# Altium PCB sample_board.PcbDoc
Units mil, origin at the board's own origin, x right, y up, seen from the top; angles counter-clockwise.
Board outline 1141.73 x 1968.5 mil, 2 copper layers (Top Layer, Bottom Layer); 3 components, 7 nets, 32 pads, 6 vias.
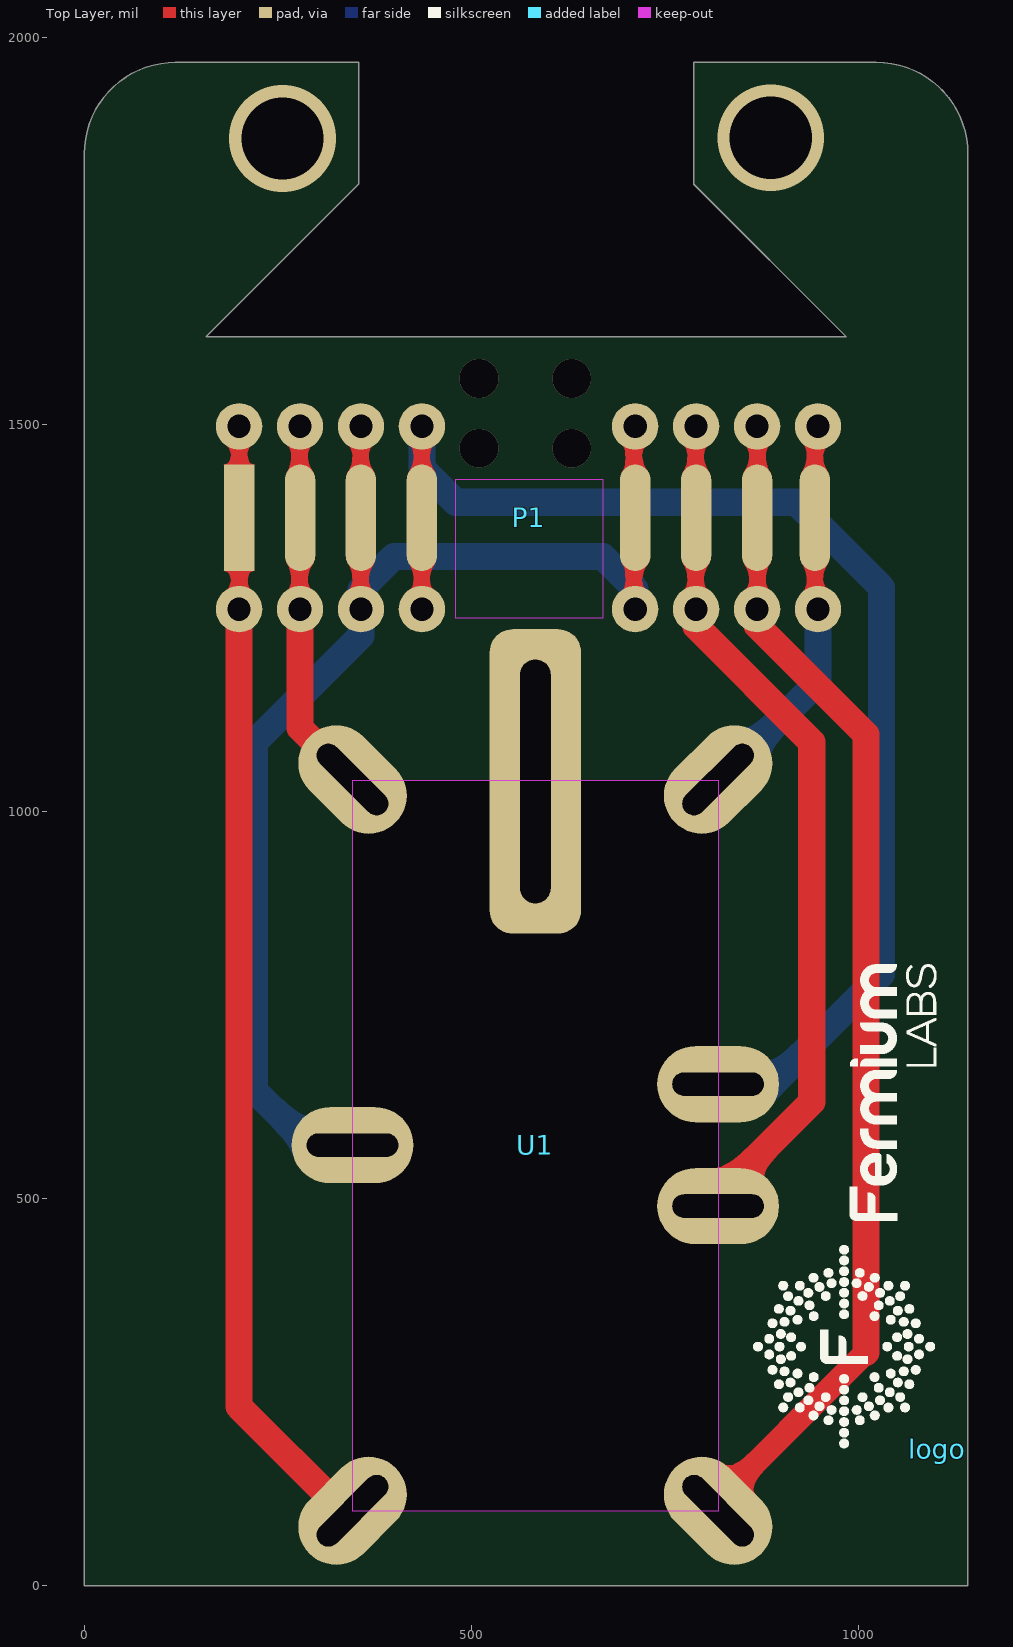
[diagram p0: Top Layer view]
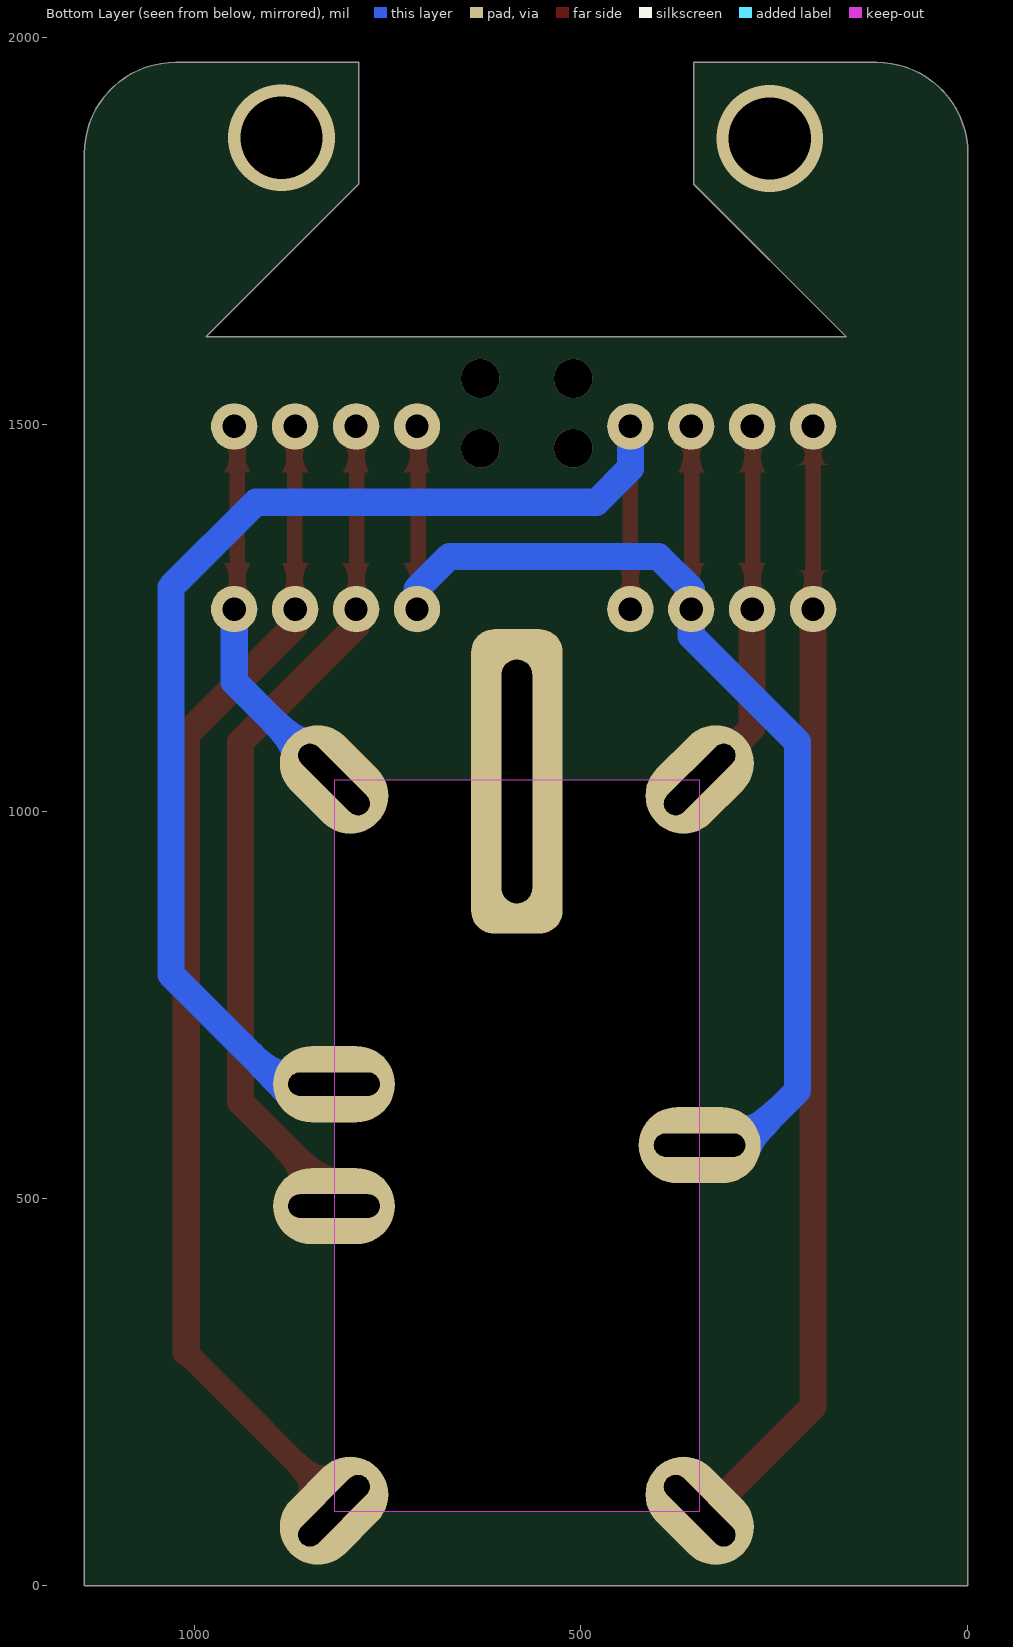
[diagram p1: Bottom Layer view, seen from below]

## Layer stack, top to bottom
Top Solder: solder mask 0.4, Solder Resist, Dk 3.5
Top Layer: signal copper 1.4
Dielectric 1: dielectric 12.6, FR-4, Dk 4.8
Bottom Layer: signal copper 1.4
Bottom Solder: solder mask 0.4, Solder Resist, Dk 3.5

## Board outline
0,0 0,1850.39 cw(c118.11,1850.39) 118.11,1968.5 354.33,1968.5 354.33,1811.02 157.48,1614.17 984.25,1614.17 787.4,1811.02 787.4,1968.5 1023.62,1968.5 cw(c1023.62,1850.39) 1141.73,1850.39 1141.73,0
cut-out: 819,96.12 346.56,96.12 346.56,1041 819,1041

## Design rules (kind name [scope] priority, off if disabled: settings)
Clearance [All] p1 off: gap=10 ignorepadtopadclearanceinfootprint=FALSE
ComponentClearance [All] p1 off: gap=10 collisioncheckmode=3 verticalgap=10 showdistances=FALSE
DiffPairsRouting [All] p1: maxlimit=10 minlimit=10 mostfreqgap=10 toplayer_minwidth=15 toplayer_maxwidth=15 toplayer_prefwidth=15 bottomlayer_minwidth=15 bottomlayer_maxwidth=15 bottomlayer_prefwidth=15 substack1={CB7ECF17-E3E6-404F-AFC1-A2D4EA55E508} toplayer_{cb7ecf17-e3e6-404f-afc1-a2d4ea55e508}_minwidth=15 toplayer_{cb7ecf17-e3e6-404f-afc1-a2d4ea55e508}_maxwidth=15 toplayer_{cb7ecf17-e3e6-404f-afc1-a2d4ea55e508}_prefwidth=15 bottomlayer_{cb7ecf17-e3e6-404f-afc1-a2d4ea55e508}_minwidth=15 bottomlayer_{cb7ecf17-e3e6-404f-afc1-a2d4ea55e508}_maxwidth=15 bottomlayer_{cb7ecf17-e3e6-404f-afc1-a2d4ea55e508}_prefwidth=15 substack2={E5E8CB27-7398-4565-A729-E75956F7CBE6} toplayer_{e5e8cb27-7398-4565-a729-e75956f7cbe6}_minwidth=15 toplayer_{e5e8cb27-7398-4565-a729-e75956f7cbe6}_maxwidth=15 toplayer_{e5e8cb27-7398-4565-a729-e75956f7cbe6}_prefwidth=15 bottomlayer_{e5e8cb27-7398-4565-a729-e75956f7cbe6}_minwidth=15 bottomlayer_{e5e8cb27-7398-4565-a729-e75956f7cbe6}_maxwidth=15 bottomlayer_{e5e8cb27-7398-4565-a729-e75956f7cbe6}_prefwidth=15 substack3={485D2BC1-8D0F-489D-82EF-096F16EA431D} toplayer_{485d2bc1-8d0f-489d-82ef-096f16ea431d}_minwidth=15 toplayer_{485d2bc1-8d0f-489d-82ef-096f16ea431d}_maxwidth=15 toplayer_{485d2bc1-8d0f-489d-82ef-096f16ea431d}_prefwidth=15 bottomlayer_{485d2bc1-8d0f-489d-82ef-096f16ea431d}_minwidth=15 bottomlayer_{485d2bc1-8d0f-489d-82ef-096f16ea431d}_maxwidth=15 bottomlayer_{485d2bc1-8d0f-489d-82ef-096f16ea431d}_prefwidth=15 substack4={A28852D3-6787-470E-80FA-86EC0CA4A88A} toplayer_{a28852d3-6787-470e-80fa-86ec0ca4a88a}_minwidth=15 toplayer_{a28852d3-6787-470e-80fa-86ec0ca4a88a}_maxwidth=15 toplayer_{a28852d3-6787-470e-80fa-86ec0ca4a88a}_prefwidth=15 bottomlayer_{a28852d3-6787-470e-80fa-86ec0ca4a88a}_minwidth=15 bottomlayer_{a28852d3-6787-470e-80fa-86ec0ca4a88a}_maxwidth=15 bottomlayer_{a28852d3-6787-470e-80fa-86ec0ca4a88a}_prefwidth=15 maxuncoupledlength=500
FanoutControl Fanout_Small [All] p1 off: bgadir=Out bgaviamode=Centered fanoutstyle=Auto fanoutdirection=Alternating viagrid=1 // Protel DXP Scope 1 Expression Was: (CompPinCount < 5)   Fanout_Small (Default Rule)
FanoutControl Fanout_Default [All] p2: bgadir=Out bgaviamode=Centered fanoutstyle=Auto fanoutdirection=Alternating viagrid=1 // Fanout_Default (Default Rule)
FanoutControl Fanout_SOIC [All] p3 off: bgadir=Out bgaviamode=Centered fanoutstyle=Auto fanoutdirection=Alternating viagrid=1 // Protel DXP Scope 1 Expression Was: IsSOIC   Fanout_SOIC (Default Rule)
FanoutControl Fanout_BGA [All] p4 off: bgadir=Out bgaviamode=Centered fanoutstyle=Auto fanoutdirection=Alternating viagrid=1 // Protel DXP Scope 1 Expression Was: IsBGA   Fanout_BGA (Default Rule)
FanoutControl Fanout_LCC [All] p5 off: bgadir=Out bgaviamode=Centered fanoutstyle=Auto fanoutdirection=Alternating viagrid=1 // Protel DXP Scope 1 Expression Was: IsLCC   Fanout_LCC (Default Rule)
HoleSize [All] p1 off: absolutevalues=TRUE maxlimit=100 minlimit=1 maxpercent=80.000 minpercent=20.000
HoleToHoleClearance [All] p1 off: gap=10 allowstackedmicrovias=TRUE
PolygonConnect [All] p1: connectstyle=Relief reliefconductorwidth=10 reliefentries=4 polygonreliefangle="90 Angle" airgapwidth=10
RoutingVias [All] p1: holewidth=28 width=50 viastyle="Through Hole" minholewidth=28 minwidth=50 maxholewidth=28 maxwidth=50
ShortCircuit [All] p1 off: allowed=FALSE
SilkToSolderMaskClearance [All] p1 off: minsilkscreentomaskgap=10 clearancetoexposedcopper=TRUE // Protel DXP Scope 1 Expression Was: IsPad
SolderMaskExpansion [All] p1: expansion=4 istentingtop=FALSE
Width [All] p1: maxlimit=50 minlimit=10 preferedwidth=25 substack1={CB7ECF17-E3E6-404F-AFC1-A2D4EA55E508} substack2={E5E8CB27-7398-4565-A729-E75956F7CBE6} substack3={485D2BC1-8D0F-489D-82EF-096F16EA431D} substack4={A28852D3-6787-470E-80FA-86EC0CA4A88A}
19 further rules are at their usual default settings.

## Components (designator, comment, footprint, x,y, rotation, side; value= is the part's Value field where it differs from the comment)
logo "fermiumlabs-logo" frm-med 1102,177 r90 top
P1 "Header 8" "Edge Connector" 200,1380 r0 top
U1 "Sample" "GERMANIUM SAMPLE" 582.78,569.3 r0 top locked

## Footprints (in the part's own frame and the unit in brackets; to place one, negate y for a bottom-side part, rotate by r counter-clockwise, add the part's x,y. Pads: shape width x height; smd on the part's side, far side on the other; paste and mask are expansions set on the pad)
"Edge Connector" [mm]
  round 1.524 hole 0.762: 1(0,-3) 1(0,3) 2(2,-3) 2(2,3) 3(4,-3) 3(4,3) 4(6,-3) 4(6,3) 5(13,-3) 5(13,3) 6(15,-3) 6(15,3) 7(17,-3) 7(17,3) 8(19,-3) 8(19,3)
  rect 1x3.5 smd: 1(0,0)
  oval 1x3.5 smd: 2(2,0) 3(4,0) 4(6,0) 5(13,0) 6(15,0) 7(17,0) 8(18.9,0)
frm-med [mil]
  silkscreen extent 1,1 626,237
"GERMANIUM SAMPLE" [mm] "Germanium sample footprint"
  rrect50% 3x10 hole 1 slot 8 at 90 deg: 0(0,11.938)
  oval 2.5x4 hole 0.762 slot 3 at 135 deg rot 45: 1(6,-12) 5(-6,12)
  oval 4x2.5 hole 0.762 slot 3 at 0 deg: 2(6,-2) 3(6,2) 6(-6,0)
  oval 2.5x4 hole 0.762 slot 3 at 45 deg rot 135: 4(6,12) 7(-6,-12)
  body extent -3.38,-10.13 3.62,9.87

## Part data
P1: "Header, 8-Pin", LatestRevisionDate=17-Jul-2002, LatestRevisionNote="Re-released for DXP Platform.", Publisher="Altium Limited"
U1: library part "Germanium Sample", "Sample germanium"

## Via types
v1: diameter 50, hole 50, Top Layer to Bottom Layer, 4 vias
v2: diameter 137.8, hole 106.3, Top Layer to Bottom Layer, 2 vias

## Nets (pads, with @x,y where several pads share a name; then routed paths per layer and width w, separated by ;. In a path a pad name is that pad's centre, name@x,y a point inside that pad or via, vN(x,y) a via of type N, cw(c..) or ccw(c..) an arc to the next point about the centre after c; other vN are vias at no path point)
NetP1_8: P1.8 U1.4 | length 527.7
  Top Layer w20: P1.8@944,1268 P1.8@944,1508
  Bottom Layer w20: U1.4@806.22,1042.44 U1.4@822.44,1042.44
  Bottom Layer w35: U1.4@822.44,1042.44 948.03,1168.03 P1.8@948.03,1261.89
SAMPLE-I_P: P1.7 U1.1 | length 1547
  Top Layer w20: P1.7@870,1270 P1.7@870,1510
  Top Layer w30: U1.1@806.22,97.56 1010,301.34
  Top Layer w35: P1.7@869.29,1261.89 869.29,1240.71 1010,1100 1010,301.34
SAMPLE-VH1_N: P1.4 U1.3 | length 1734.1
  Top Layer w20: P1.4@436,1257 P1.4@436,1497
  Bottom Layer w35: P1.4@436.22,1498.11 436.22,1443.78 480,1400 920,1400 1030,1290 1030,790 888.74,648.74 U1.3@806.22,648.74
SAMPLE-VH1_P: P1.3 P1.5 U1.6 | length 1742.8
  Top Layer w20: P1.3@357,1269 P1.3@357,1509 ; P1.5@710,1270 P1.5@710,1510
  Bottom Layer w35: U1.6@333.78,570 290,570 220,640 220,1090 357.48,1227.48 357.48,1261.89 357.48,1287.48 400,1330 670,1330 711.81,1288.19 P1.5@711.81,1261.89
SAMPLE-VH2_N: P1.6 U1.2 | length 1127.9
  Top Layer w20: P1.6@790,1270 P1.6@790,1510
  Top Layer w35: P1.6@790.55,1261.89 790.55,1239.45 940,1090 940,625.04 U1.2@806.22,491.26
SAMPLE-Vr_N: P1.2 U1.5 | length 492.1
  Top Layer w20: P1.2@278,1268 P1.2@278,1508
  Top Layer w35: P1.2@278.74,1271.89 278.74,1261.89 278.74,1108.26 328.5,1058.5 U1.5@346.56,1058.5
SAMPLE-Vr_P: P1.1 U1.7 | length 1467.9
  Top Layer w20: P1.1@200,1271.89 200,1380 200,1498.11 P1.1@200,1510
  Top Layer w35: P1.1@200,1271.89 200,1261.89 200,231.34 U1.7@333.78,97.56
pads on no net: U1.0
copper on no net:
  other v1: 510,1470 630,1470 510,1560 630,1560
  other v2: 256,1870 887,1871

## Keep-outs
Top Layer:
  region: 480,1430 670,1430 670,1250 480,1250

## Silkscreen, mask and mechanical layers (free items; w line width, h text height)
Mechanical 1:
  lines w10: 880.16,1002.15 915.16,967.15 915.16,1041.15 880.16,1006.15 ; 880.16,1005.15 1100.16,1005.15 ; 1096.84,1005.21 1123.84,1005.21 1282.84,1164.21 1282.84,1231.21 ; 787.4,1968.5 1023.62,1968.5 cw(c1023.62,1850.39) 1141.73,1850.39 1141.73,0 0,0 0,1850.39 cw(c118.11,1850.39) 118.11,1968.5 354.33,1968.5 354.33,1811.02 157.48,1614.17 984.25,1614.17 787.4,1811.02 787.4,1968.5 ; 787.4,1968.5 787.4,1968.5
  text "Cut out" at 1259.84,1299.21 h60